# Altium PCB PCB1.PcbDoc
Units mm, origin at the board's own origin, x right, y up, seen from the top; angles counter-clockwise.
Board outline 43.18 x 73.66 mm, 2 copper layers (Top Layer, Bottom Layer); 22 components, 15 nets, 65 pads, 0 vias.
Unrouted connection lines stored in the file: 6.
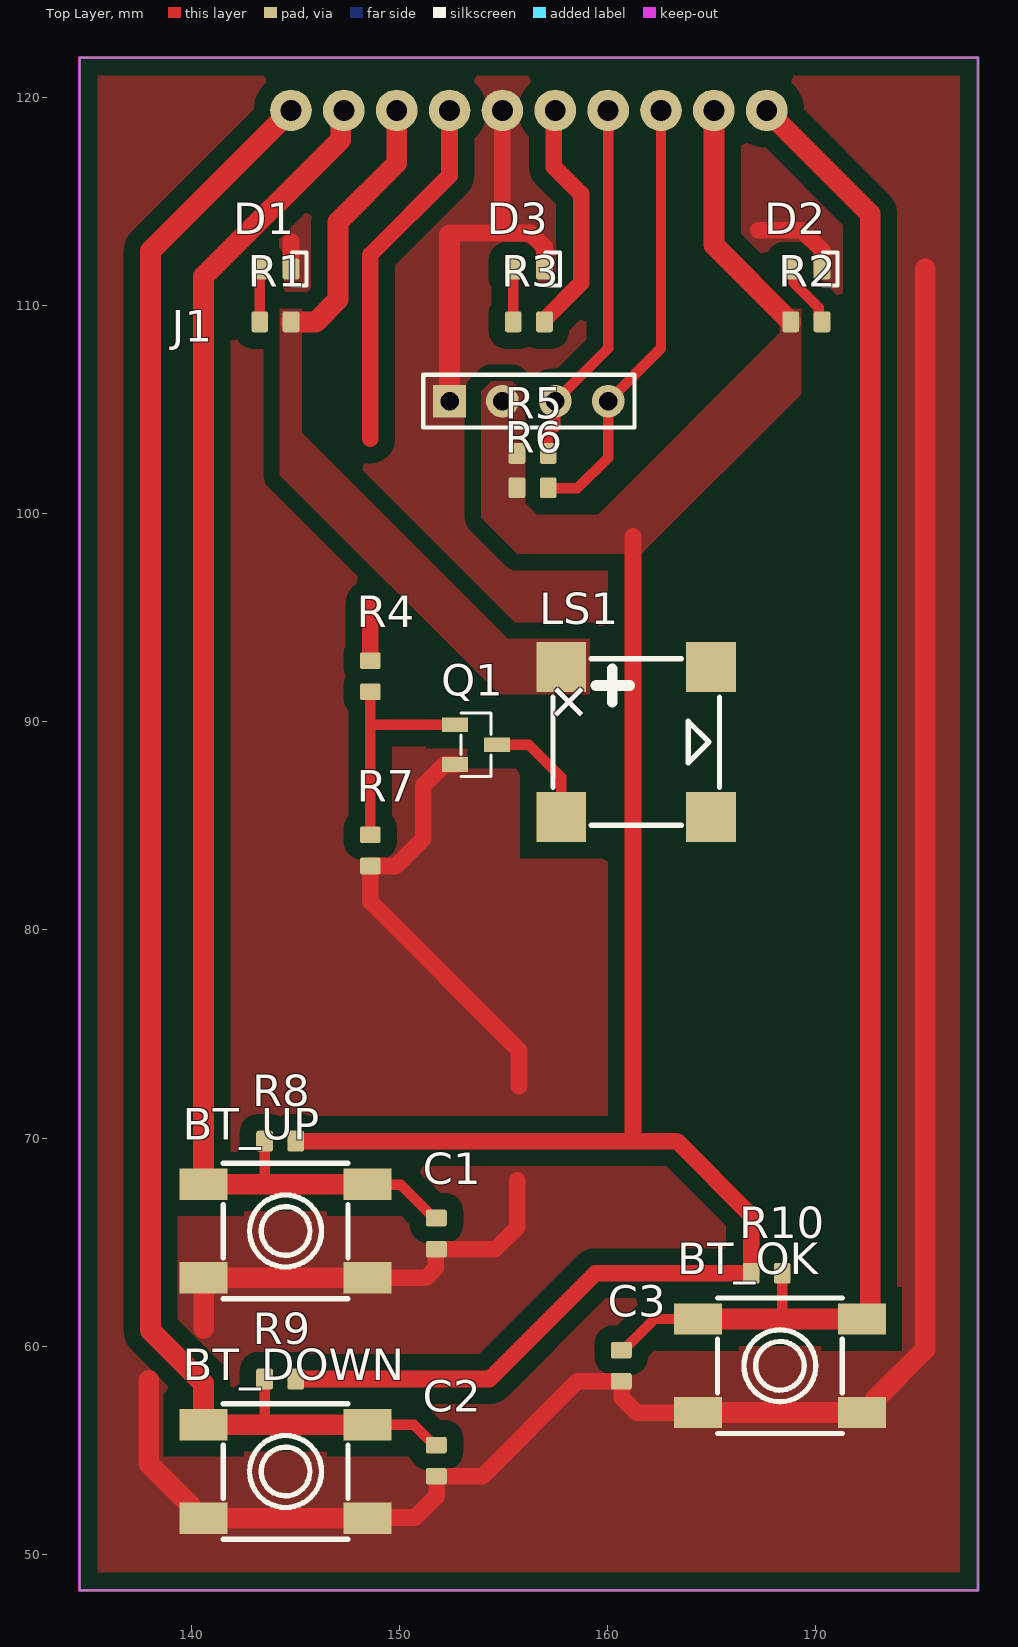
[diagram p0: Top Layer view]
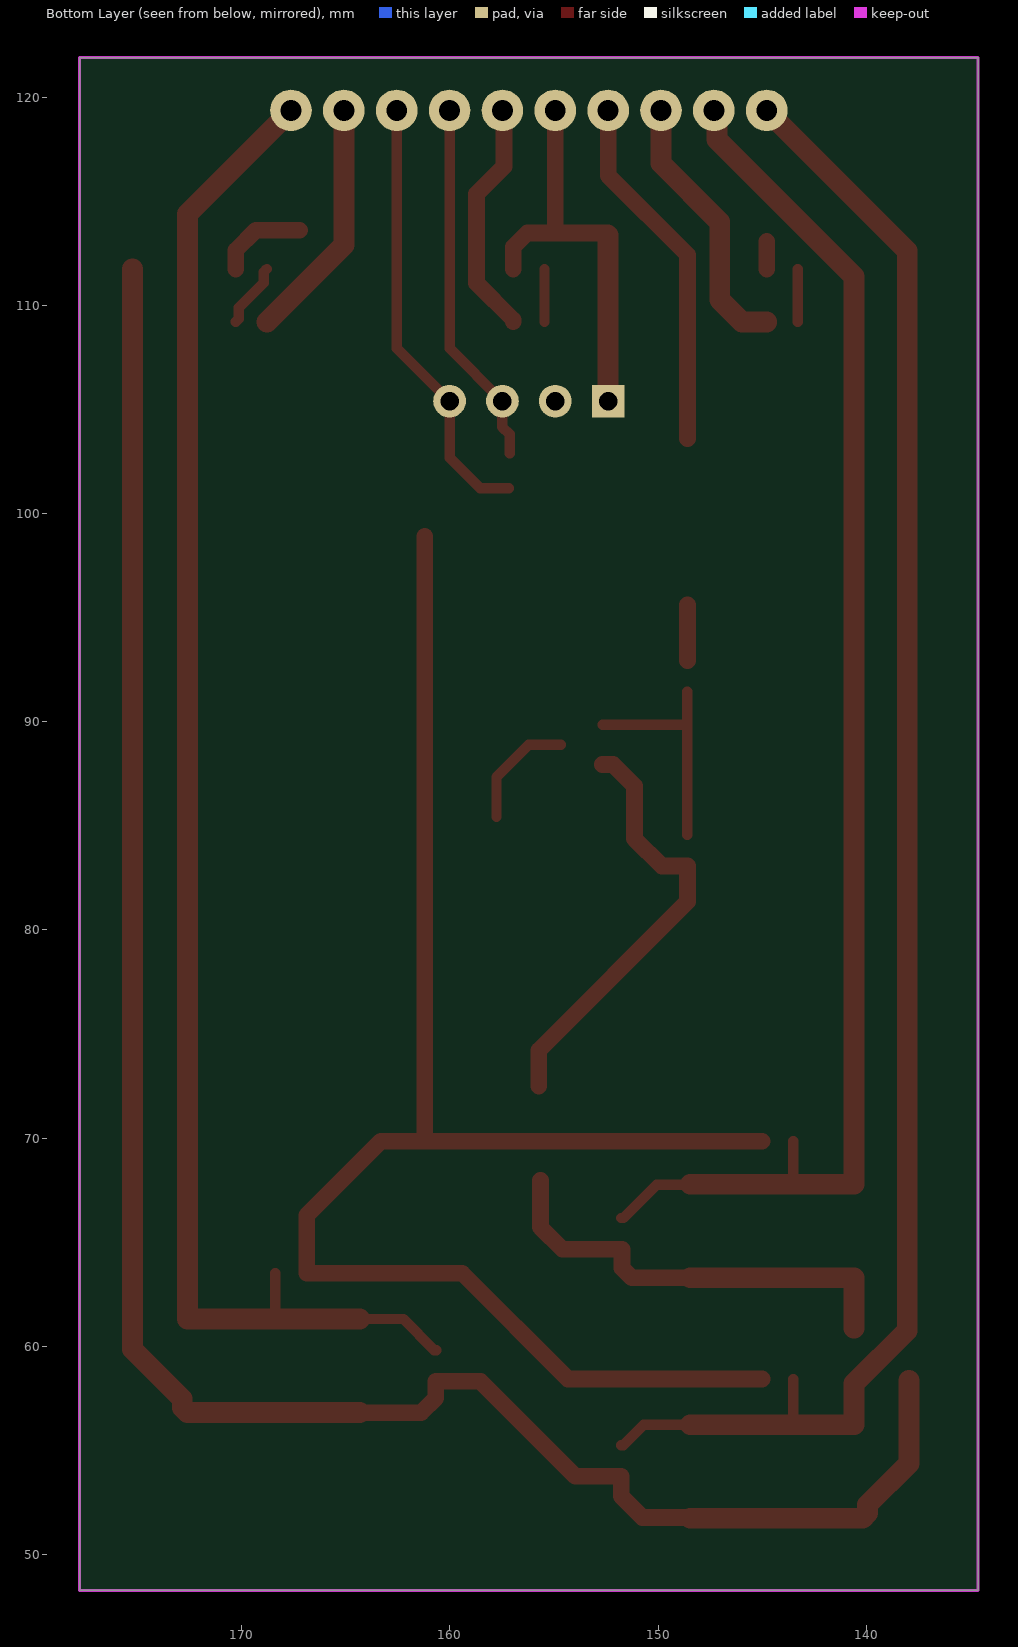
[diagram p1: Bottom Layer view, seen from below]
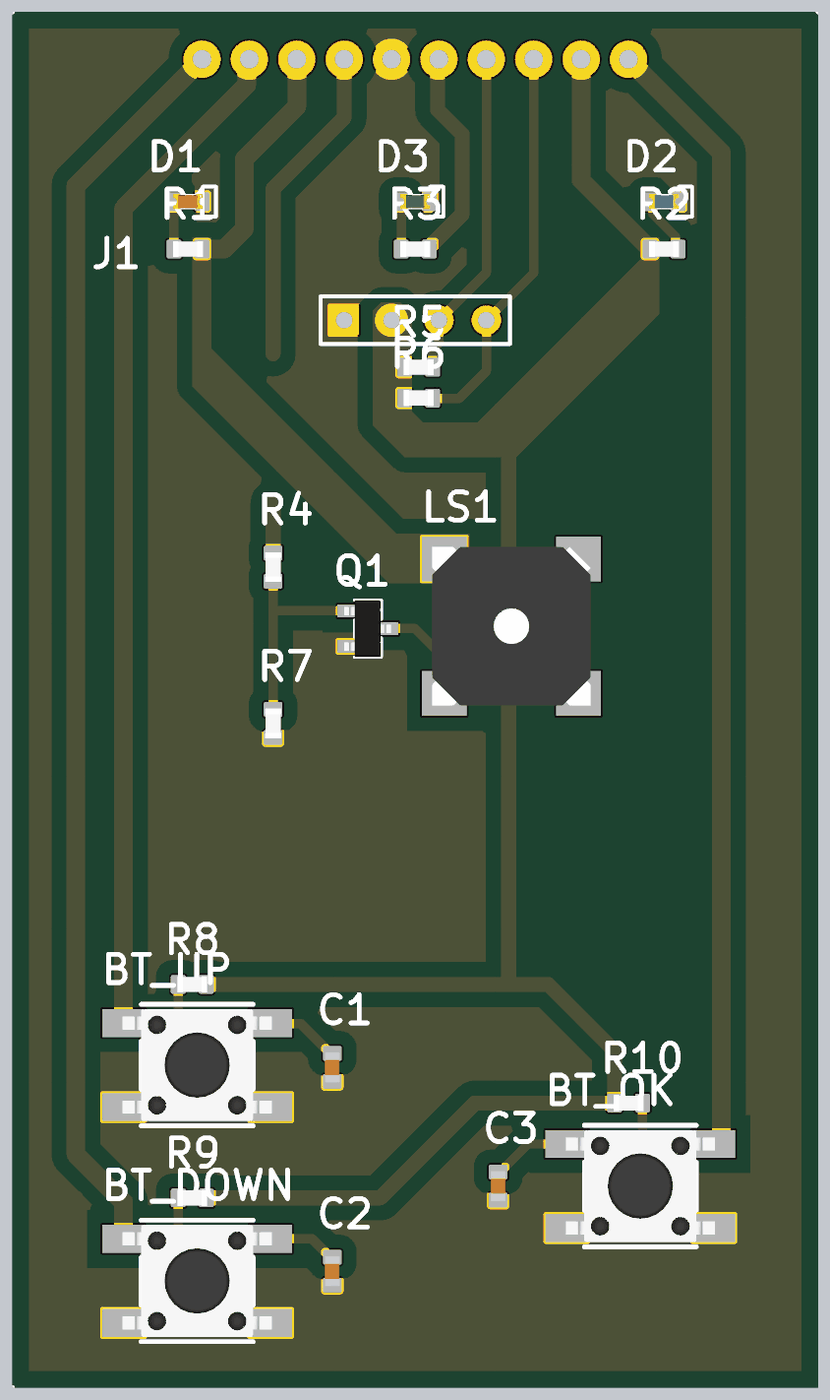
[diagram p2: 3D render of the assembled board from above, using the file's embedded part models]

## Layer stack, top to bottom
Top Solder: solder mask 0.0102, Solder Resist, Dk 3.5
Top Layer: signal copper 0.0356
Dielectric 1: dielectric 0.32, FR-4, Dk 4.8
Bottom Layer: signal copper 0.0356
Bottom Solder: solder mask 0.0102, Solder Resist, Dk 3.5

## Board outline
134.62,48.26 134.62,121.92 177.8,121.92 177.8,48.26

## Design rules (kind name [scope] priority, off if disabled: settings)
Clearance [All] p1: gap=0.8 ignorepadtopadclearanceinfootprint=FALSE
PlaneClearance [All] p1: clearance=0.8
PolygonConnect [All] p1: connectstyle=Direct reliefconductorwidth=0.254 reliefentries=4 polygonreliefangle="90 Angle" airgapwidth=0.254
RoutingVias [All] p1: holewidth=0.711 width=1.27 viastyle="Through Hole" minholewidth=0.711 minwidth=1.27 maxholewidth=0.711 maxwidth=1.27
SolderMaskExpansion [All] p1: expansion=0.102 istentingtop=FALSE
SupplyNets "Schematic Supply Nets_2" [InNet('GND')] p1: voltage=0.000
SupplyNets "Schematic Supply Nets_1" [InNet('+3V3')] p2: voltage=0.000
SupplyNets "Schematic Supply Nets" [InNet('+5V')] p3: voltage=0.000
Width [All] p1: maxlimit=1 minlimit=0.3 preferedwidth=0.8
29 further rules are at their usual default settings.

## Components (designator, comment, footprint, x,y, rotation, side; value= is the part's Value field where it differs from the comment)
BT_DOWN "TS-1102S-B-G-B" SW-SMD_4P-L6.0-W6.4-P4.50-LS8.6 144.518,53.975 r180 top
BT_OK "TS-1102S-B-G-B" SW-SMD_4P-L6.0-W6.4-P4.50-LS8.6 168.275,59.055 r180 top
BT_UP "TS-1102S-B-G-B" SW-SMD_4P-L6.0-W6.4-P4.50-LS8.6 144.518,65.532 r180 top
C1 "100nF" CAP_0603 151.765,65.405 r90 top
C2 "100nF" CAP_0603 151.765,54.495 r90 top
C3 "100nF" CAP_0603 160.655,59.055 r90 top
D1 "RED" LED_0603_RED 144.03,111.76 r180 top
D2 "BLUE" LED_0603_BLUE 169.545,111.76 r180 top
D3 "GREEN" LED_0603_GREEN 156.21,111.76 r180 top
J1 "Module Oled 1.3 I2C_No_3D" "Module Oled 1.3 - No 3D" 156.21,105.41 r0 top
LS1 "MLT-8530" BUZ-SMD_4P-L8.5-W8.5-P8.50-BR 161.29,88.9 r270 top
Q1 "MMBT3904" SOT-23-3_L2.9-W1.3-P1.90-LS2.4-BR 153.67,88.9 r180 top
R1 "4K7" RES_0603 144.03,109.22 r180 top
R2 "1K" RES_0603 169.545,109.22 r0 top
R3 "1K" RES_0603 156.21,109.22 r180 top
R4 "1K" RES_0603 148.59,92.19 r270 top
R5 "10K" RES_0603 156.388,102.895 r180 top
R6 "10K" RES_0603 156.388,101.244 r180 top
R7 "10K" RES_0603 148.59,83.82 r90 top
R8 "10K" RES_0603 144.26,69.85 r0 top
R9 "10K" RES_0603 144.26,58.42 r0 top
R10 "10K" RES_0603 167.64,63.5 r180 top

## Footprints (in the part's own frame and the unit in brackets; to place one, negate y for a bottom-side part, rotate by r counter-clockwise, add the part's x,y. Pads: shape width x height; smd on the part's side, far side on the other; paste and mask are expansions set on the pad)
BUZ-SMD_4P-L8.5-W8.5-P8.50-BR [mm]
  rect 2.4x2.4 smd: 1(-3.727,-3.524) 2(3.473,-3.524) 3(3.473,3.676) 4(-3.727,3.676)
  silkscreen extent -4.13,-3.92 3.87,4.08, body extent -4.38,-4.17 4.12,4.33, height 3.06
CAP_0603 [mm]
  rrect25% 0.8x1 smd: 1(-0.75,0) 2(0.75,0)
  body extent -0.8,-0.4 0.8,0.4, height 0.51
LED_0603_BLUE [mm]
  rrect25% 0.8x1 smd: A(0.75,0) K(-0.75,0)
  silkscreen extent -1.5,-0.8 -0.8,0.8, body extent -0.8,-0.4 0.8,0.4, height 0.6
LED_0603_GREEN [mm]
  rrect25% 0.8x1 smd: A(0.75,0) K(-0.75,0)
  silkscreen extent -1.5,-0.8 -0.8,0.8, body extent -0.8,-0.4 0.8,0.4, height 0.6
LED_0603_RED [mm]
  rrect25% 0.8x1 smd: A(0.75,0) K(-0.75,0)
  silkscreen extent -1.5,-0.8 -0.8,0.8, body extent -0.8,-0.4 0.8,0.4, height 0.6
"Module Oled 1.3 - No 3D" [mil]
  rect 62x62 hole 35: 1(-150,0)
  round 62 hole 35: 2(-50,0) 3(50,0) 4(150,0)
  silkscreen extent -200,-50 200,50
RES_0603 [mm]
  rrect25% 0.8x1 smd: 1(-0.75,0) 2(0.75,0)
  body extent -0.8,-0.43 0.8,0.43, height 0.52
SOT-23-3_L2.9-W1.3-P1.90-LS2.4-BR [mm]
  rect 1.25x0.7 smd: 1(1,-0.95) 2(1,0.95) 3(-1,0)
  silkscreen extent -0.73,-1.53 0.73,1.53, body extent -1.24,-1.49 1.26,1.51, height 1.11
SW-SMD_4P-L6.0-W6.4-P4.50-LS8.6 [mm]
  rect 2.3x1.5 smd: 1(-3.938,2.25) 2(3.938,2.25) 3(-3.938,-2.25) 4(3.938,-2.25)
  silkscreen extent -3,-3.25 3,3.25, body extent -4,-3 4,3, height 6

## Part data
BT_DOWN BT_OK BT_UP: "Botton SMD TACTILE SWITCHES ROHS", LCSC Part Number=C381064, Manufacturer="XKB Connectivity", Manufacturer Part Number=TS-1102S-C-F-B, Package=SMD-4_6.0x6.0x4.5P-2, Assembly Type="SMT Assembly"
C1 C2 C3: library part CAP_0603, "Capacitor SMD 0603"
D1: library part LED_0603_RED, "LED 0603 RED SMD"
D2: library part LED_0603_BLUE, "LED 0603 BLUE SMD"
D3: library part LED_0603_GREEN, "LED 0603 GREEN SMD"
J1: "Module Oled 1.3 I2C", LCSC Part Number=N/A, Manufacturer=EPCB.vn, Package="Through P=2.54", Assembly Type="Hand Soldering", Manufacturer Part Number=N/A
LS1: library part BUZ_MLT-8530, "BUZZERS MAGNETIC NO 2700HZ 3.6V 2.5 ~ 4.5V 8.5MM X 8.5MM 8.5*8.5*3MM ROHS", LCSC Part Number=C94599, Manufacturer="Jiangsu Huaneng Elec", Package=SMD-4_8.7x8.7x3.0, Assembly Type="SMT Assembly", Manufacturer Part Number=MLT-8530
Q1: "MMBT3904 TRANSISTORS (NPN/PNP) NPN 200MA 40V SOT-23(SOT-23-3) ROHS", LCSC Part Number=C20526, Manufacturer="Changjiang Electronics Tech (CJ)", Package=SOT-23-3, Assembly Type="SMT Assembly", Manufacturer Part Number=MMBT3904
R1 R2 R3 R4 R5 R6 R7 R8 R9 R10: library part RES_0603, "Resistor SMD 0603"

## Free pads (board coordinates)
  round 2 hole 1: 2(144.78,119.38) 3(147.32,119.38) 4(149.86,119.38) 5(152.4,119.38) 6(154.94,119.38) 7(157.48,119.38) 8(160.02,119.38) 9(162.56,119.38) 10(165.1,119.38) 11(167.64,119.38)

## Nets (pads, with @x,y where several pads share a name; then routed paths per layer and width w, separated by ;. In a path a pad name is that pad's centre, name@x,y a point inside that pad or via, vN(x,y) a via of type N, cw(c..) or ccw(c..) an arc to the next point about the centre after c; other vN are vias at no path point)
+3V3: J1.2 pad.10 R2.1 R5.2 R6.2 R8.2 R9.2 R10.2 | length 91
  Top Layer w0.8: R9.2 154.33,58.42 159.41,63.5 R10.2 166.89,66.282 163.322,69.85 161.214,69.85 ; R8.2 161.214,69.85 ; 161.214,98.915 161.214,69.85 ; R2.1 R2.1@168.795,109.32
  Top Layer w1: pad.10 165.1,112.915 R2.1
+5V: LS1.1 pad.4 R1.1 | length 13
  Top Layer w1: R1.1 145.974,109.22 147.041,110.287 147.041,114.021 149.86,116.84 pad.4
BT_DOWN: BT_DOWN.3 BT_DOWN.4 C2.2 pad.2 R9.1 | length 80.7
  Top Layer w0.5: 143.51,56.225 R9.1 ; BT_DOWN.3 150.685,56.225 151.665,55.245 C2.2
  Top Layer w1: pad.2@144.728,119.328 138.024,112.624 138.024,60.757 140.58,58.2 BT_DOWN.4 143.51,56.225 BT_DOWN.3
BT_OK: BT_OK.3 BT_OK.4 C3.2 pad.11 R10.1 | length 75
  Top Layer w0.5: C3.2 160.755,59.805 162.255,61.305 BT_OK.4 ; 168.275,61.305 168.39,61.42 R10.1
  Top Layer w1: BT_OK.4 168.275,61.305 172.613,61.305 172.613,114.407 pad.11
BT_UP: BT_UP.3 BT_UP.4 C1.2 pad.3 R8.1 | length 68.3
  Top Layer w0.5: 143.51,67.782 R8.1 ; BT_UP.3 148.481,67.757 150.063,67.757 151.665,66.155 C1.2
  Top Layer w1: pad.3 147.175,119.235 147.175,117.99 140.58,111.395 BT_UP.4 143.51,67.782 BT_UP.3
BUZZER: pad.5 R4.1 | length 20
  Top Layer w0.8: R4.1 148.59,95.631 ; 148.59,103.607 148.59,112.446 152.4,116.256 pad.5
GND: BT_DOWN.1 BT_DOWN.2 BT_OK.1 BT_OK.2 BT_UP.1 BT_UP.2 C1.1 C2.1 C3.1 D1.K D2.K D3.K J1.1 pad.6 Q1.2 R7.1 | length 168.3
  Top Layer w0.8: D1.K 144.78,113.081 ; BT_DOWN.1 148.495,51.764 150.749,51.764 151.778,52.793 C2.1@151.778,53.745 ; BT_UP.1 151.262,63.282 151.731,63.751 151.731,64.655 C1.1 154.596,64.655 155.651,65.71 155.651,67.97 ; C2.1 C2.1@151.778,53.745 ; 152.4,113.487 154.94,113.487 ; Q1.2 152.161,87.95 151.13,86.919 151.13,84.379 149.821,83.07 R7.1 148.59,81.356 155.735,74.211 155.735,72.498 ; pad.6 154.94,113.487 ; D3.K 156.96,112.813 156.286,113.487 154.94,113.487 ; BT_OK.2 161.381,56.805 160.68,57.506 160.68,58.305 C3.1 158.533,58.305 153.973,53.745 C2.1@151.778,53.745 ; 167.234,113.614 169.342,113.614 170.295,112.661 D2.K
  Top Layer w1: 137.947,58.344 137.947,54.358 139.93,52.375 139.93,51.975 140.18,51.725 BT_DOWN.2 BT_DOWN.1 ; 140.589,60.858 140.589,63.273 BT_UP.2 BT_UP.1 ; J1.1 152.4,113.386 ; BT_OK.2 BT_OK.1 172.613,56.805 172.863,57.055 172.863,57.455 175.26,59.852 175.26,111.76
LED_LIFE: pad.7 R3.1 | length 11.5
  Top Layer w0.8: R3.1 156.96,109.32 158.725,111.085 158.725,115.367 157.404,116.688 157.404,119.304 pad.7
NetD1_A: D1.A R1.2 | length 2.5
  Top Layer w0.5: R1.2 D1.A
NetD2_A: D2.A R2.2 | length 3.2
  Top Layer w0.5: D2.A 168.945,111.61 168.945,111.09 170.145,109.89 170.145,109.37 R2.2
NetD3_A: D3.A R3.2 | length 2.5
  Top Layer w0.5: R3.2 D3.A
NetLS1_2: LS1.2 Q1.3 | length 5.7
  Top Layer w0.5: Q1.3 156.21,88.9 157.766,87.344 LS1.2
NetQ1_1: Q1.1 R4.2 R7.2 | length 11
  Top Layer w0.254: R4.2 R4.2@148.69,91.44
  Top Layer w0.5: R7.2 R4.2 ; 148.607,89.863 148.62,89.85 Q1.1
SCL: J1.3 pad.8 R5.1 | length 17.7
  Top Layer w0.3: R5.1@157.124,102.909 R5.1
  Top Layer w0.5: R5.1@157.124,102.909 157.124,103.81 157.48,104.165 J1.3 160.02,107.95 pad.8
SDA: J1.4 pad.9 R6.1 | length 21.2
  Top Layer w0.3: R6.1 R6.1@157.163,101.219
  Top Layer w0.5: R6.1@157.163,101.219 158.547,101.219 160.02,102.692 J1.4 162.56,107.95 pad.9
pads on no net: LS1.3 LS1.4

## Polygon pours and split planes (outlines as drawn)
GND on Top Layer "GND_L01_P002" (solid, remove dead copper, pour order 2): 134.62,121.92 134.62,48.26 177.8,48.26 177.8,121.92
+5V on Top Layer "+5V_L01_P001" (solid, pour order 1): 144.247,109.855 144.247,101.854 154.788,91.313 159.131,91.313 159.131,93.98 155.194,93.98 145.288,103.886 145.288,109.855
+3V3 on Top Layer "+3V3_L01_P000" (solid, pour order 0): 168.275,109.855 169.291,109.855 169.291,105.74 161.62,98.069 155.651,98.069 153.924,99.797 153.924,105.893 154.407,106.375 155.423,106.375 156.032,105.766 156.032,100.508 156.591,99.949 159.537,99.949 168.275,108.687

## Keep-outs
Keep-Out Layer:
  the board outline again, w0.15

## Dimensions
134.62,121.92 to 134.62,48.26 on Top Overlay
134.62,121.92 to 177.8,121.92 on Top Overlay

## Text inside footprints (layer, text, board x,y; h text height)
D1: Mechanical 13 "+" at 142.713,111.152 h0.5 r180
D2: Mechanical 13 "+" at 168.228,111.152 h0.5 r180
D3: Mechanical 13 "+" at 154.893,111.152 h0.5 r180
LS1: Top Overlay "+" at 159.585,90.746 h2.03 r135